# Altium PCB Brduino-Nano.PcbDoc
Units mm, origin at the board's own origin, x right, y up, seen from the top; angles counter-clockwise.
Board outline 43.69 x 19.3 mm, 4 copper layers (Top Layer, InternalPlane1, InternalPlane2, Bottom Layer), stack 1.385 mm thick; 48 components, 77 nets, 233 pads, 118 vias.
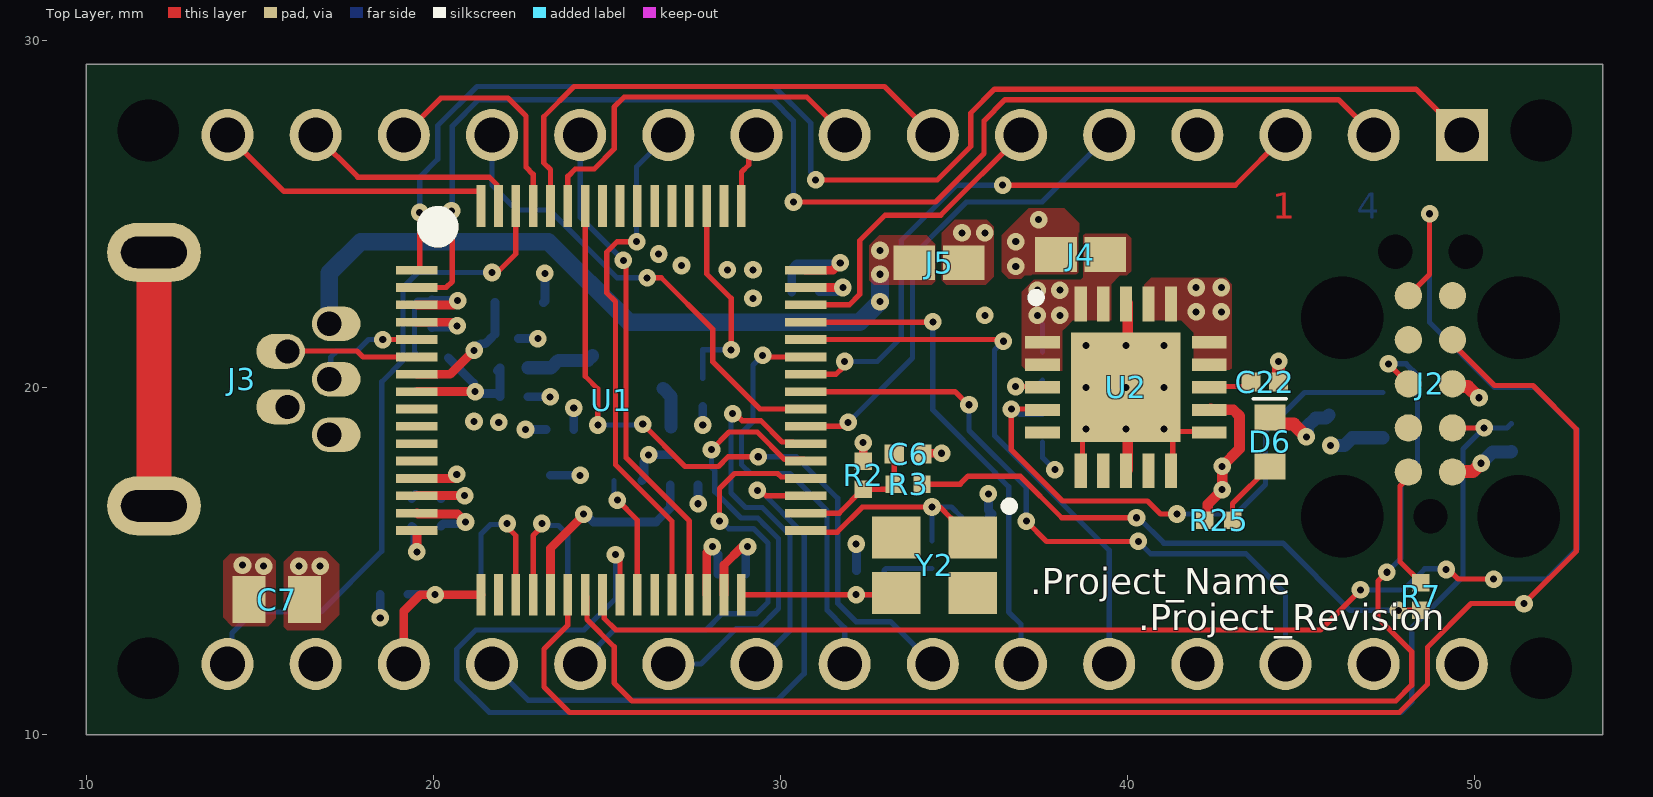
[diagram p0: Top Layer view]
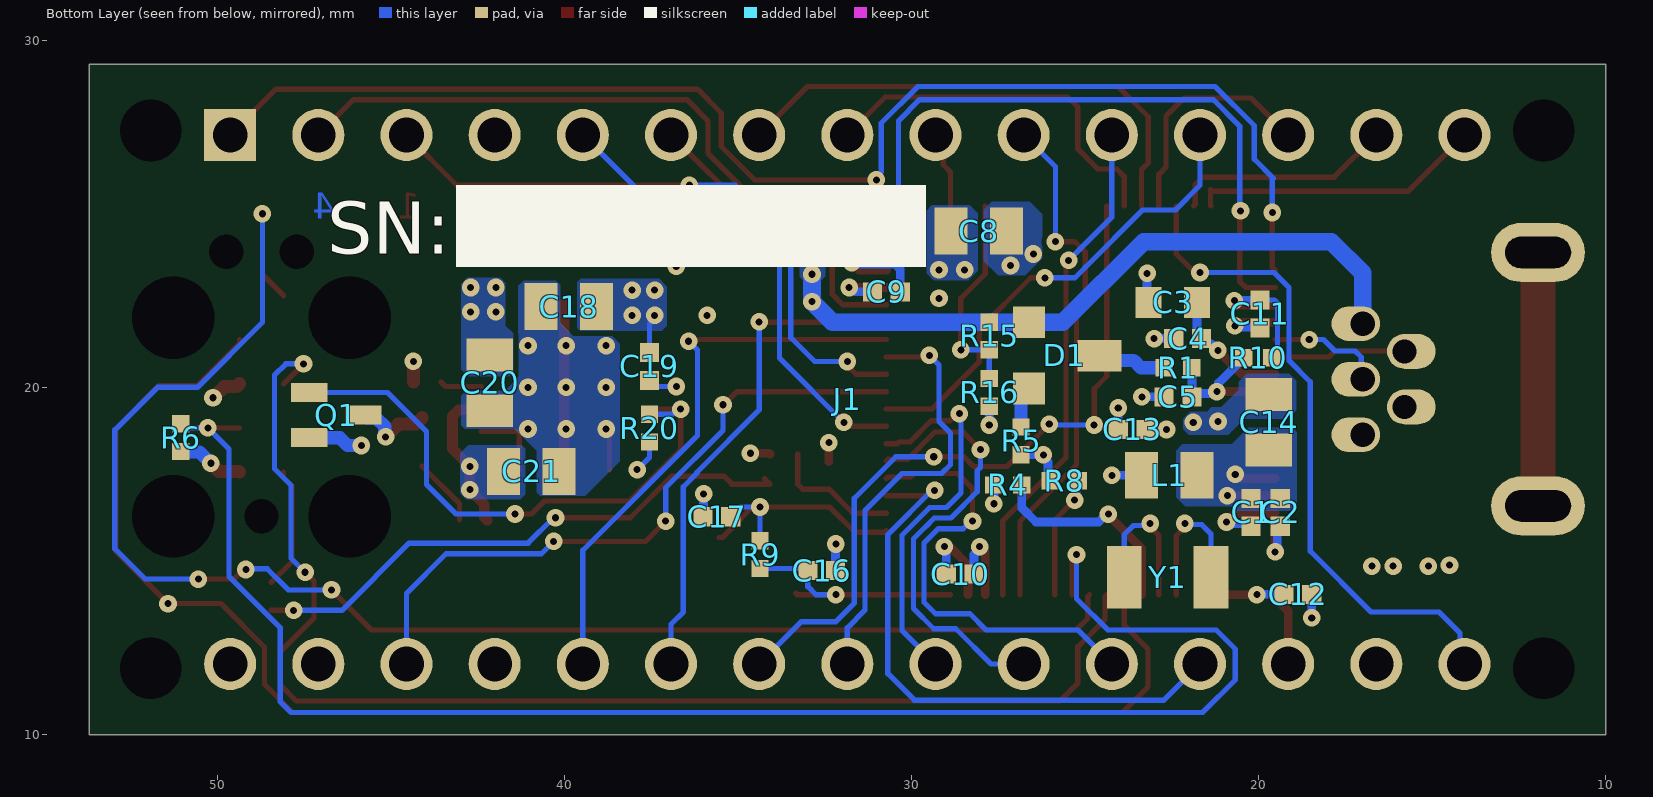
[diagram p1: Bottom Layer view, seen from below]
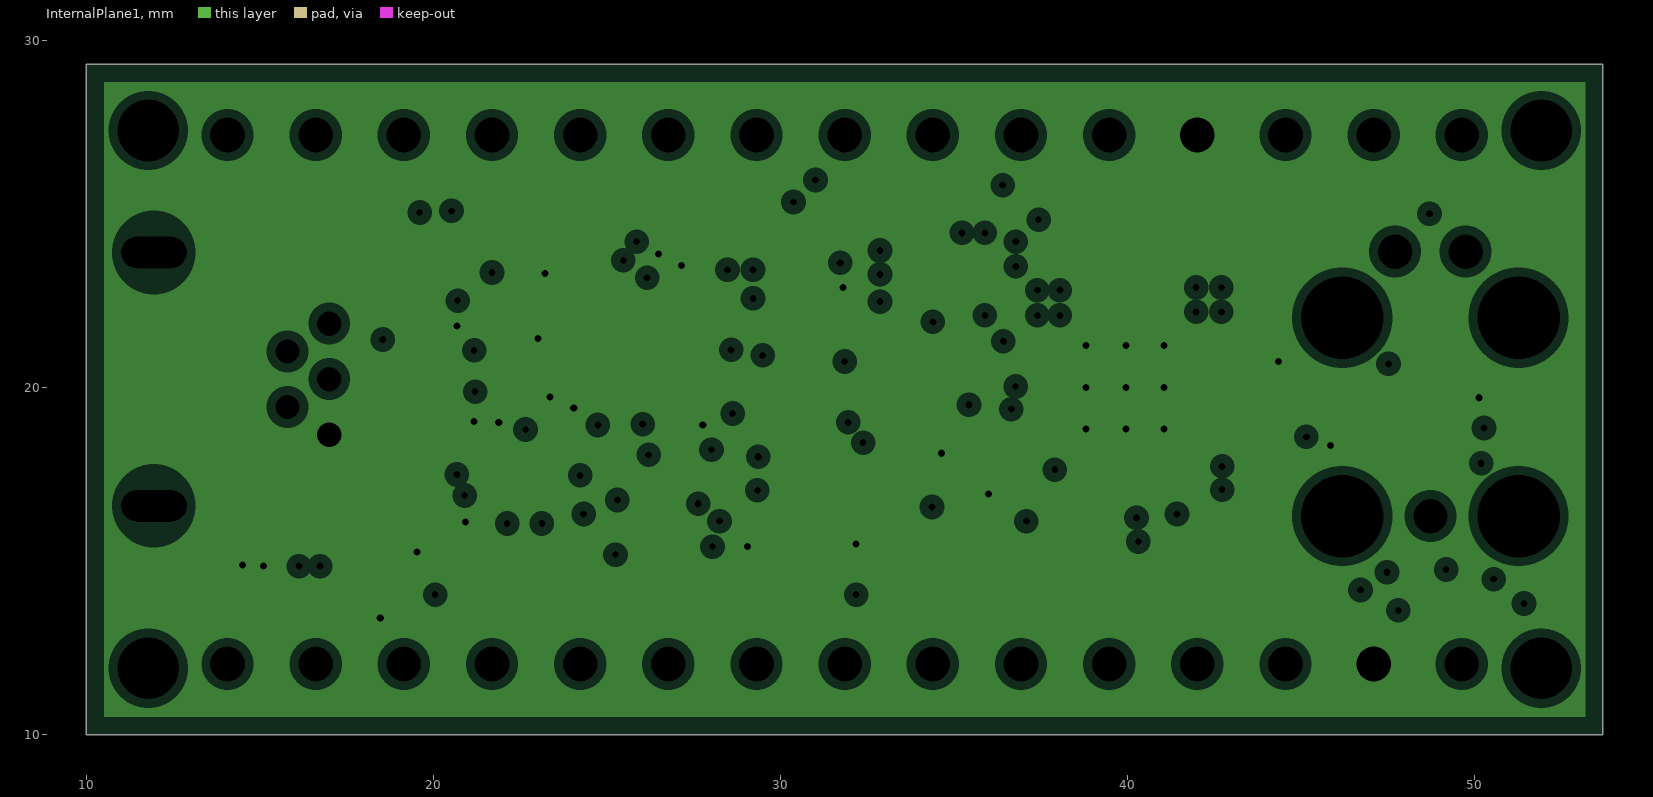
[diagram p2: InternalPlane1, clearances drawn from the general rule]
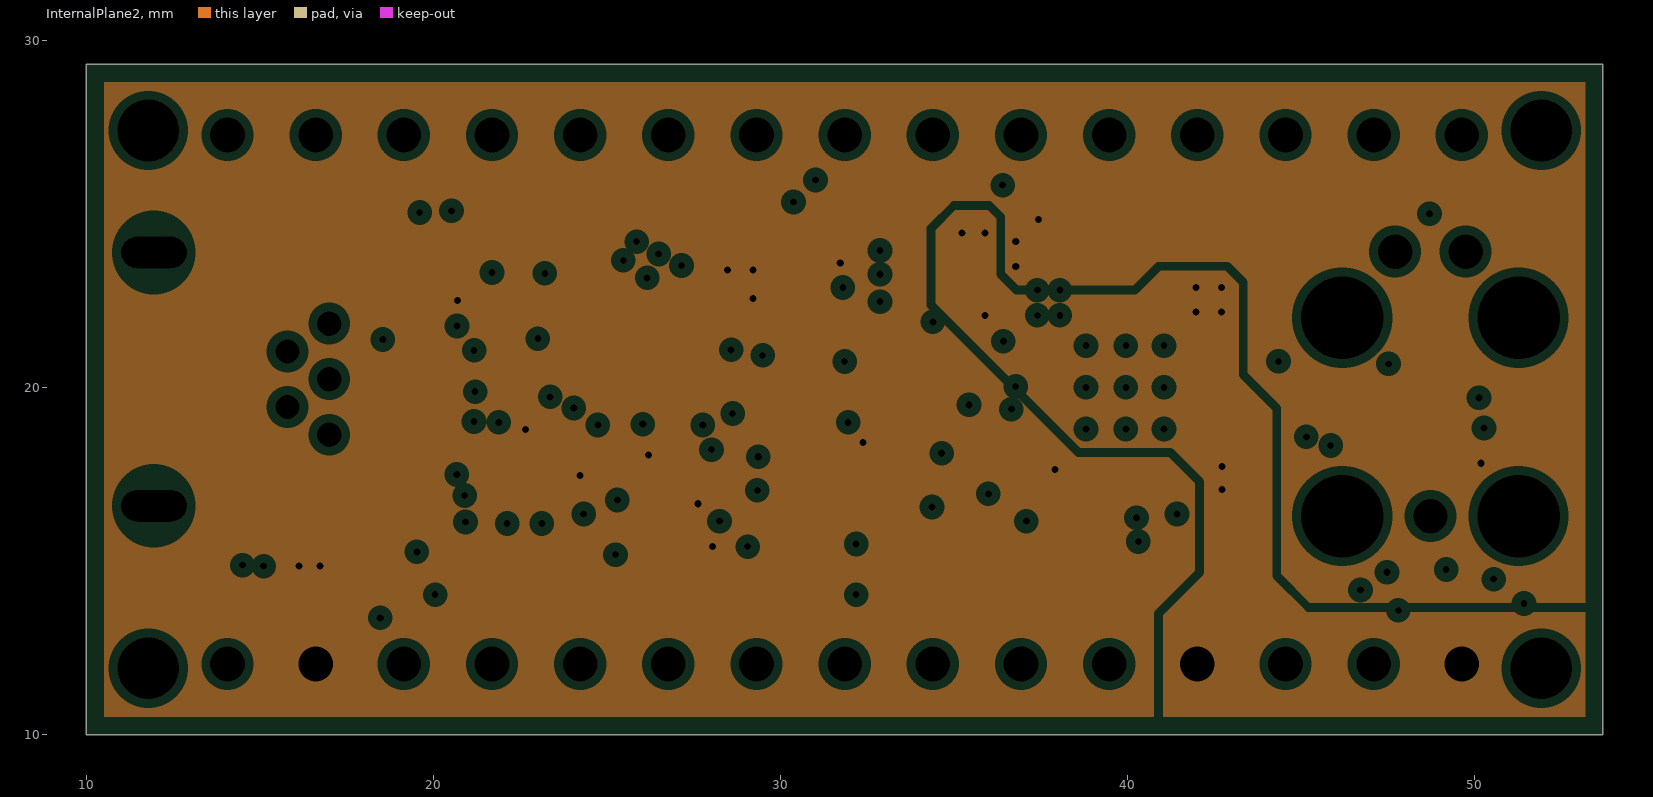
[diagram p3: InternalPlane2, clearances drawn from the general rule]

## Layer stack, top to bottom
Top Solder: solder mask 0.0127, Solder Resist, Dk 3.5
Top Layer: signal copper 0.0175
Dielectric1: prepreg 0.14, FR-4, Dk 4.3
InternalPlane1: plane copper 0.035, net GND
Dielectric2: core 1, FR-4, Dk 4.3
InternalPlane2: plane copper 0.035, net (Multiple Nets)
Dielectric3: prepreg 0.14, FR-4, Dk 4.3
Bottom Layer: signal copper 0.0175
Bottom Solder: solder mask 0.0127, Solder Resist, Dk 3.5

## Board outline
10,10 53.688,10 53.688,29.304 10,29.304

## Design rules (kind name [scope] priority, off if disabled: settings)
AssemblyTestPointUsage [All] p1 off:
AssemblyTestpoint [All] p1 off: testpointundercomponent=TRUE minsize=1.016 maxsize=2.54 preferedsize=1.524 minholesize=0 maxholesize=1.016 preferedholesize=0.813 testpointgrid=0.025 usegrid=FALSE gridtolerance=0 allowsidebottom=TRUE
Clearance Clearance-primary [InNetClass('HV-P')] p1: gap=0.7 ignorepadtopadclearanceinfootprint=FALSE
Clearance [All] p2: gap=0.152 ignorepadtopadclearanceinfootprint=FALSE
ComponentClearance [All] p1 off: gap=0.254 collisioncheckmode=3 verticalgap=0.254 showdistances=FALSE
DiffPairsRouting DiffPairsRouting_USB [InDifferentialPair('CPUSIGA.USB-D_1')] p1: maxlimit=0.254 minlimit=0.152 mostfreqgap=0.152 toplayer_minwidth=0.195 toplayer_maxwidth=0.381 toplayer_prefwidth=0.195 bottomlayer_minwidth=0.195 bottomlayer_maxwidth=0.381 bottomlayer_prefwidth=0.195 maxuncoupledlength=12.7
DiffPairsRouting [InDifferentialPairClass('HighSpeedDiff')] p2: maxlimit=0.256 minlimit=0.156 mostfreqgap=0.156 toplayer_minwidth=0.152 toplayer_maxwidth=0.381 toplayer_prefwidth=0.152 bottomlayer_minwidth=0.152 bottomlayer_maxwidth=0.381 bottomlayer_prefwidth=0.152 maxuncoupledlength=14
FabricationTestPointUsage TestPointUsage [All] p1 off: valid=0 allowmultiple=FALSE
FabricationTestpoint Testpoint [All] p1 off: side=3 testpointundercomponent=TRUE minsize=1.016 maxsize=2.54 preferedsize=1.524 minholesize=0 maxholesize=1.016 preferedholesize=0.813 testpointgrid=0.025 allowsidetop=TRUE allowsidebottom=TRUE usegrid=TRUE gridtolerance=0
Height [All] p1 off: minheight=0 maxheight=25.4 prefheight=12.7
HoleSize [All] p1: absolutevalues=TRUE maxlimit=5.08 minlimit=0.2 maxpercent=80.000 minpercent=20.000
MatchedLengths MatchedLengthsDiff [InDifferentialPair('ETH-TX_8') or InDifferentialPair('ETH-RX_8') or InDifferentialPair('CPUSIGA.USB-D_1')] p1: tolerance=1 checknetsindiffpair=TRUE checkdiffpairvsdiffpair=FALSE checkxsignals=FALSE checkothers=FALSE
MatchedLengths [InxSignalClass('RMII-IF')] p2: tolerance=0.254 checknetsindiffpair=FALSE checkdiffpairvsdiffpair=TRUE checkxsignals=TRUE checkothers=TRUE
MinimumSolderMaskSliver [All] p1 off: minsoldermaskwidth=0.08
NetAntennae [All] p1 off: netantennaetolerance=0
PlaneClearance [All] p1: clearance=0.254
PlaneConnect [All] p1: planeconnectstyle=Direct reliefexpansion=0.508 reliefentries=4 reliefconductorwidth=0.254 reliefairgap=0.254
PolygonConnect [All] p1: connectstyle=Direct reliefconductorwidth=0.254 reliefentries=4 polygonreliefangle="90 Angle" airgapwidth=0.254
RoomDefinition U_Brduino-MCU1 [InComponentClass('U_Brduino-MCU1')] p1: confinementstyle=ConfineIn formatcopy=TRUE lockcomponents=FALSE outline 13.769,12.759 54.256,12.759 54.256,26.424 13.769,26.424
RoomDefinition Brduino-Main [InComponentClass('Brduino-Main')] p2: confinementstyle=ConfineIn formatcopy=TRUE lockcomponents=FALSE outline 9.721,9.721 9.721,29.583 53.967,29.583 53.967,9.721
RoomDefinition U_Brduino-MCU-Main [InComponentClass('U_Brduino-MCU-Main')] p3 off: confinementstyle=ConfineIn formatcopy=TRUE lockcomponents=FALSE outline 7.749,12.81 37.34,12.81 37.34,25.383 7.749,25.383
RoomDefinition U_Brduino-PwrLin [InComponentClass('U_Brduino-PwrLin')] p4 off: confinementstyle=ConfineIn formatcopy=TRUE lockcomponents=FALSE outline 36.095,15.451 48.287,15.451 48.287,24.748 36.095,24.748
RoutingVias [All] p1: holewidth=0.203 width=0.508 viastyle="Through Hole" minholewidth=0.203 minwidth=0.508 maxholewidth=0.508 maxwidth=1.016
SilkToSilkClearance [All] p1 off: silktosilkclearance=0.254
SilkToSolderMaskClearance SilkscreenOverComponentPads [IsPad] p1 off: minsilkscreentomaskgap=0.254 clearancetoexposedcopper=TRUE
SolderMaskExpansion [All] p1: expansion=0.051 istentingtop=FALSE
Width Width_HighSpeedDiff [InDifferentialPairClass('HighSpeedDiff')] p1: maxlimit=0.152 minlimit=0.152 preferedwidth=0.152 minimp=50.000000 maximp=50.000000 favimp=50.000000
Width Width_Fiducial [IsArc and InComponent('FID*')] p2: maxlimit=0.254 minlimit=0.089 preferedwidth=0.254
Width [All] p3: maxlimit=5.08 minlimit=0.152 preferedwidth=0.152
16 further rules are at their usual default settings.

## Classes and differential pairs
component class U_Brduino-PwrLin: C18 C19 C20 C21 C22 D6 J4 Q1 R20 R25 U2
component class U_Brduino-MCU-Main: C16 C17 J3 R9 R15 R16 Y2
component class U_Brduino-MCU1: C1 C2 C3 C4 C5 C6 C7 C8 C9 C10 C11 C12 C13 C14 D1 J2 L1 R1 R2 R3 R4 R5 R6 R7 R8 R10 U1 Y1
component class Brduino-Main: J1 J5
differential pair USB-D_2: +USB-D_2_P -USB-D_2_N

## Components (designator, comment, footprint, x,y, rotation, side; value= is the part's Value field where it differs from the comment)
C1 "C" C0402 20.211,16.401 r270 bottom value=100nF
C2 "C" C0402 19.373,16.401 r270 bottom value=100nF
C3 "C" C0603 22.471,22.446 r0 bottom value=2u2F
C4 "C" C0402 22.04,21.405 r0 bottom value=100nF
C5 "C" C0402 22.319,19.728 r0 bottom value=100nF
C6 "C" C0402 33.673,18.077 r0 top value=100nF
C7 "C" C0805 15.486,13.886 r180 top value=10uF
C8 "C" C0805 28.059,24.503 r180 bottom value=10uF
C9 "C" C0402 30.719,22.752 r0 bottom value=100nF
C10 "C" C0402 28.593,14.623 r0 bottom value=100nF
C11 "C" C0402 19.957,22.116 r270 bottom value=100nF
C12 "C" C0402 18.865,14.039 r180 bottom value=100nF
C13 "C" C0402 23.64,18.788 r180 bottom value=100nF
C14 "C" C0805 19.703,18.992 r270 bottom value=4u7F
C16 "C" C0402 32.581,14.724 r180 bottom value=22pF
C17 "C" C0402 35.603,16.274 r0 bottom value=22pF
C18 "C" C0805 39.869,22.327 r180 bottom value=22uF
C19 "C" C0402 37.544,20.602 r270 bottom value=10nF
C20 "C" C0805 42.144,20.127 r90 bottom value=10uF
C21 "C" C0805 40.944,17.577 r0 bottom value=10uF
C22 "C" C0402 43.944,20.152 r0 top value=10nF
D1 "D" SOT23 25.596,20.922 r270 bottom
D6 "D" LED0603 44.094,18.427 r90 top value=Green
J1 "X" ARDUINO-NANO 31.844,19.652 r180 bottom locked
J2 "X" JLINK-NEEDLE 48.719,20.102 r90 top locked
J3 "X" Molex-0565790519 14.47,20.236 r0 top locked
J4 "R" JumperSMD 38.644,23.827 r180 top value=0R
J5 "R" JumperSMD 34.562,23.589 r180 top value=0R
L1 "L" L0805 22.573,17.468 r180 bottom value=600R@100MHz
Q1 "Q" SOT323 46.569,19.202 r180 bottom
R1 "R" R0402 22.319,20.566 r180 bottom value=0R
R2 "R" R0402 32.377,17.468 r90 top value=4K7
R3 "R" R0402 33.673,17.214 r0 top value=22R
R4 "R" R0402 27.221,17.188 r0 bottom value=100R
R5 "R" R0402 26.84,18.458 r90 bottom value=0R
R6 "R" R0402 51.044,18.552 r270 bottom value=10K
R7 "R" R0402 48.444,13.977 r270 top value=33R
R8 "R" R0402 25.596,17.315 r0 bottom value=10K
R9 "R" R0402 34.359,15.182 r270 bottom value=1M
R10 "R" R0402 20.022,20.853 r0 bottom value=0R
R15 "R" R0402 27.755,21.481 r90 bottom value=4K7
R16 "R" R0402 27.755,19.855 r90 bottom value=10K
R20 "R" R0402 37.544,18.827 r270 bottom value=4K7
R25 "R" R0402 42.619,16.177 r0 top value=3K9
U1 "U" NXP-SOT1699-1 25.119,19.627 r0 top locked
U2 "U" S-PVQFN-N20 39.944,20.002 r0 top
Y1 "Y" CM7V-T1A 22.619,14.524 r180 bottom value=32.768KHz
Y2 "Y" FA-238 34.435,14.877 r180 top locked value=24.0000MHz

## Footprints (in the part's own frame and the unit in brackets; to place one, negate y for a bottom-side part, rotate by r counter-clockwise, add the part's x,y. Pads: shape width x height; smd on the part's side, far side on the other; paste and mask are expansions set on the pad)
ARDUINO-NANO [mm]
  rect 1.5x1.5 hole 1: 1(-17.78,7.62)
  round 1.5 hole 1: 2(-15.24,7.62) 3(-12.7,7.62) 4(-10.16,7.62) 5(-7.62,7.62) 6(-5.08,7.62) 7(-2.54,7.62) 8(0,7.62) 9(2.54,7.62) 10(5.08,7.62) 11(7.62,7.62) 12(10.16,7.62) 13(12.7,7.62) 14(15.24,7.62) 15(17.78,7.62) 16(17.78,-7.62) 17(15.24,-7.62) 18(12.7,-7.62) 19(10.16,-7.62) 20(7.62,-7.62) 21(5.08,-7.62) 22(2.54,-7.62) 23(0,-7.62) 24(-2.54,-7.62) 25(-5.08,-7.62) 26(-7.62,-7.62) 27(-10.16,-7.62) 28(-12.7,-7.62) 29(-15.24,-7.62) 30(-17.78,-7.62)
  round 0 hole 1.778 unplated: M1(-20.066,-7.747) M2(-20.066,7.747) M3(20.066,7.747) M4(20.066,-7.747)
  body extent -19.05,-8.89 19.05,8.89, height 6.35
C0402 [mm] "Chip Capacitor; Body 1.0x0.5mm (LxW typ), IPC High Density"
  rect 0.55x0.55 smd: 1(-0.4,0) 2(0.4,0)
  body extent -0.5,-0.25 0.5,0.25, height 0.5
C0603 [mm] "Chip Capacitor; Body 1.6x0.8mm (LxW typ), IPC High Density"
  rect 0.75x0.9 smd: 1(-0.7,0) 2(0.7,0)
  body extent -0.8,-0.4 0.8,0.4, height 0.8
C0805 [mm] "Chip Capacitor; Body 2.0x1.3mm (LxW typ), IPC High Density"
  rect 0.95x1.35 smd: 1(-0.8,0) 2(0.8,0)
  body extent -1,-0.62 1,0.63, height 0.6
CM7V-T1A [mm]
  rect 1x1.8 smd: 1(-1.25,0) 2(1.25,0)
  body extent -1.6,-0.75 1.6,0.75, height 0.75
FA-238 [mm]
  rect 1.4x1.2 smd: 1(-1.1,-0.8) 2(1.1,-0.8) 3(1.1,0.8) 4(-1.1,0.8)
  silkscreen extent -2.28,-1.82 -2.03,-1.58, body extent -1.6,-1.25 1.6,1.25, height 0.8
JLINK-NEEDLE [mil]
  round 31 smd paste-31: 1(-100,-25) 2(-50,-25) 3(0,-25) 4(50,-25) 5(100,-25) 6(100,25) 7(50,25) 8(0,25) 9(-50,25) 10(-100,25)
  round 0 hole 93.5 unplated: M1(-150,100) M2(-150,-100) M3(75,100) M4(75,-100)
  round 0 hole 39 unplated: P1(-150,0) P2(150,40) P3(150,-40)
JumperSMD [mm] "Chip Resistor, Body 1.6x0.8mm (LxW typ), IPC High Density"
  rect 1.2x1 smd: 1(-0.711,0) 2(0.711,0)
  body extent -0.8,-0.4 0.8,0.4, height 0.45
L0805 [mm]
  rect 0.95x1.35 smd: 1(-0.8,0) 2(0.8,0)
  body extent -1,-0.62 1,0.63, height 0.6
LED0603 [mm]
  rect 0.75x0.9 smd: 1(-0.7,0) 2(0.7,0)
  silkscreen extent 1.25,-0.47 1.25,0.48, body extent -0.8,-0.4 0.8,0.4, height 0.63
Molex-0565790519 [mm]
  oval 1.4x1 hole 0.7 copper offset 0.2,0: 1(2.525,1.6) 3(2.525,0) 5(2.525,-1.6)
  oval 1.4x1 hole 0.7 copper offset -0.2,0: 2(1.325,0.8) 4(1.325,-0.8)
  oval 2.7x1.7 hole 0.9 slot 1.9 at 0 deg: M1(-2.525,-3.65) M2(-2.525,3.65)
  body extent -6.27,-3.85 2.73,3.85, height 3.95
NXP-SOT1699-1 [mm] "TSQFP, 64-Leads, Body 10.00x10.00mm, Pitch 0.50mm, IPC High Density"
  rect 1.2x0.25 smd: 1(-5.6,3.75) 2(-5.6,3.25) 3(-5.6,2.75) 4(-5.6,2.25) 5(-5.6,1.75) 6(-5.6,1.25) 7(-5.6,0.75) 8(-5.6,0.25) 9(-5.6,-0.25) 10(-5.6,-0.75) 11(-5.6,-1.25) 12(-5.6,-1.75) 13(-5.6,-2.25) 14(-5.6,-2.75) 15(-5.6,-3.25) 16(-5.6,-3.75) 33(5.6,-3.75) 34(5.6,-3.25) 35(5.6,-2.75) 36(5.6,-2.25) 37(5.6,-1.75) 38(5.6,-1.25) 39(5.6,-0.75) 40(5.6,-0.25) 41(5.6,0.25) 42(5.6,0.75) 43(5.6,1.25) 44(5.6,1.75) 45(5.6,2.25) 46(5.6,2.75) 47(5.6,3.25) 48(5.6,3.75)
  rect 0.25x1.2 smd: 17(-3.75,-5.6) 18(-3.25,-5.6) 19(-2.75,-5.6) 20(-2.25,-5.6) 21(-1.75,-5.6) 22(-1.25,-5.6) 23(-0.75,-5.6) 24(-0.25,-5.6) 25(0.25,-5.6) 26(0.75,-5.6) 27(1.25,-5.6) 28(1.75,-5.6) 29(2.25,-5.6) 30(2.75,-5.6) 31(3.25,-5.6) 32(3.75,-5.6) 49(3.75,5.6) 50(3.25,5.6) 51(2.75,5.6) 52(2.25,5.6) 53(1.75,5.6) 54(1.25,5.6) 55(0.75,5.6) 56(0.25,5.6) 57(-0.25,5.6) 58(-0.75,5.6) 59(-1.25,5.6) 60(-1.75,5.6) 61(-2.25,5.6) 62(-2.75,5.6) 63(-3.25,5.6) 64(-3.75,5.6)
  silkscreen extent -5.3,4.7 -4.7,5.3, body extent -6,-6 6,6, height 1.35
R0402 [mm] "Chip Resistor, Body 1.1x0.5mm (LxW typ), IPC High Density"
  rect 0.5x0.5 smd: 1(-0.4,0) 2(0.4,0)
  body extent -0.5,-0.25 0.5,0.25, height 0.35
S-PVQFN-N20 [mm] "(RGW) QFN 5mmx5mm, RM 0.65mm"
  rect 1x0.35 smd: 1(-2.4,1.3) 2(-2.4,0.65) 3(-2.4,0) 4(-2.4,-0.65) 5(-2.4,-1.3) 11(2.4,-1.3) 12(2.4,-0.65) 13(2.4,0) 14(2.4,0.65) 15(2.4,1.3)
  rect 0.35x1 smd: 6(-1.3,-2.4) 7(-0.65,-2.4) 8(0,-2.4) 9(0.65,-2.4) 10(1.3,-2.4) 16(1.3,2.4) 17(0.65,2.4) 18(0,2.4) 19(-0.65,2.4) 20(-1.3,2.4)
  rect 3.15x3.15 smd: 21(0,0)
  silkscreen extent -2.71,2.46 -2.46,2.71, body extent -2.58,-2.58 2.59,2.59, height 1
SOT23 [mil]
  rect 36x36 smd: 1(-37.5,-40) 2(37.5,-40)
  rect 36x50 smd: 3(0.5,40)
  body extent -59,-49 59,49, height 43
SOT323 [mm]
  rect 1.05x0.55 smd: 1(-0.775,0.65) 2(-0.775,-0.65) 3(0.775,0)
  body extent -1.15,-1.05 1.15,1.05, height 1

## Part data
C1 C2 C4 C5 C6 C9 C10 C11 C12 C13: library part CAP, "CAP CER 0.1UF 25V X7R 0402", 04. Manufacturer=Yageo, 05. Manufacturer PN=CC0402KRX7R8BB104, 01. Distributor=DigiKey, 02. Distributor PN=311-2077-6-ND, 03. Unit Price=0.08, Parameters="X7R, 25V, 10%", POPULATED=yes
C3: library part CAP, "CAP CER 2.2UF 10V X5R 0603", 04. Manufacturer="Samsung Electro-Mechanics", 05. Manufacturer PN=CL10A225KP8NNNC, 01. Distributor=DigiKey, 02. Distributor PN=1276-1085-6-ND, 03. Unit Price=0.08, Parameters="X7R, 25V, 10%", POPULATED=yes
C7 C8: library part CAP, "CAP CER 10UF 10V X7R 0805", 04. Manufacturer="Murata Electronics", 05. Manufacturer PN=GRM21BR71A106KA73L, 01. Distributor=DigiKey, 02. Distributor PN=490-10516-6-ND, 03. Unit Price=0.21, Parameters="X7R, 25V, 10%", POPULATED=yes
C14: library part CAP, "CAP CER 4.7UF 10V X7R 0805", 04. Manufacturer="Samsung Electro-Mechanics", 05. Manufacturer PN=CL21B475KPFNNNE, 01. Distributor=DigiKey, 02. Distributor PN=1276-2972-6-ND, 03. Unit Price=0.21, Parameters="X7R, 25V, 10%", POPULATED=yes
C16 C17: library part CAP, "CAP CER 22PF 16V C0G/NP0 0402", 04. Manufacturer=KEMET, 05. Manufacturer PN=C0402C220J4GACTU, 01. Distributor=DigiKey, 02. Distributor PN=399-8954-6-ND, 03. Unit Price=0.08, Parameters="X7R, 25V, 10%", POPULATED=yes
C18: library part CAP, "CAP CER 22UF 10V X5R 0805", 04. Manufacturer="Murata Electronics", 05. Manufacturer PN=GRM21BR61A226ME44#, 01. Distributor=DigiKey, 02. Distributor PN=490-10746-6-ND, 03. Unit Price=0.49, Parameters="X7R, 25V, 10%", POPULATED=yes
C19 C22: library part CAP, "CAP CER 10000PF 50V X7R 0402", 04. Manufacturer="Murata Electronics", 05. Manufacturer PN=GRM155R71H103KA88D, 01. Distributor=DigiKey, 02. Distributor PN=490-4516-6-ND, 03. Unit Price=0.08, Parameters="X7R, 25V, 10%", POPULATED=yes
C20 C21: library part CAP, "CAP CER 10UF 25V X5R 0805", 04. Manufacturer="Murata Electronics", 05. Manufacturer PN=GRM21BR61E106KA73L, 01. Distributor=DigiKey, 02. Distributor PN=490-5523-6-ND, 03. Unit Price=0.37, Parameters="X7R, 25V, 10%", POPULATED=yes
D1: library part DUALSDIODE-CC, "DIODE ARRAY SCHOTTKY 30V SOT23-3", 04. Manufacturer=ONSEMI, 05. Manufacturer PN=BAT54C, 01. Distributor=DigiKey, 02. Distributor PN=BAT54CFSCT-ND, 03. Unit Price=0.18, POPULATED=yes
D6: library part LED, "LED GREEN CLEAR 1608 SMD", 04. Manufacturer=KINGBRIGHT, 05. Manufacturer PN=APHD1608LCGCK, 01. Distributor=DigiKey, 02. Distributor PN=754-2031-6-ND, 03. Unit Price=0.34, Parameters="If >= 2mA", POPULATED=yes
J1: library part ARDUINO-NANO-CON, 01. Distributor=DigiKey
J2: library part JLINK-NEEDLE, 01. Distributor=DigiKey
J3: library part MICRO-USB, "CONN RCPT USB2.0 MINI AB 5P R/A", 04. Manufacturer=Molex, 05. Manufacturer PN=0565790519, 01. Distributor=DigiKey, 02. Distributor PN=WM17121-ND, 03. Unit Price=2.04, POPULATED=yes
J4 J5: library part Jumper, "RES SMD 0 OHM JUMPER 1/10W 0603", 04. Manufacturer=Yageo, 05. Manufacturer PN=RC0603JR-070RL, 01. Distributor=DigiKey, 02. Distributor PN=311-0.0GRDKR-ND, 03. Unit Price=0.08, POPULATED=yes
L1: library part FERRITE, "FERRITE BEAD 600 OHM 0805 1LN", 04. Manufacturer=WUERTH, 05. Manufacturer PN=742792040, 01. Distributor=DigiKey, 02. Distributor PN=732-1620-6-ND, 03. Unit Price=0.18, Parameters="Idc=2A, Rdc=0.15R", POPULATED=yes
Q1: library part MOSFET-N-D, "MOSFET N-CHANNEL 30V 1A SC70", 04. Manufacturer=NEXPERIA, 05. Manufacturer PN=PMF250XNEX, 01. Distributor=DigiKey, 02. Distributor PN=1727-2693-6-ND, 03. Unit Price=0.31, POPULATED=yes
R1 R5 R10: library part RES1A, "RES SMD 0 OHM JUMPER 1/16W 0402", 04. Manufacturer=Yageo, 05. Manufacturer PN=RC0402JR-070RL, 01. Distributor=DigiKey, 02. Distributor PN=311-0.0JRDKR-ND, 03. Unit Price=0.08, Parameters="1/16W, 50V, 1%", POPULATED=yes
R2 R15 R20: library part RES1A, "RES SMD 4.7K OHM 1% 1/16W 0402", 04. Manufacturer=Yageo, 05. Manufacturer PN=RC0402FR-074K7L, 01. Distributor=DigiKey, 02. Distributor PN=311-4.7KLRDKR-ND, 03. Unit Price=0.08, Parameters="1/16W, 50V, 1%", POPULATED=yes
R3: library part RES1A, "RES SMD 22 OHM 1% 1/16W 0402", 04. Manufacturer=Yageo, 05. Manufacturer PN=RC0402FR-0722RL, 01. Distributor=DigiKey, 02. Distributor PN=311-22.0LRDKR-ND, 03. Unit Price=0.08, Parameters="1/16W, 50V, 1%", POPULATED=yes
R4: library part RES1A, "RES SMD 100 OHM 1% 1/16W 0402", 04. Manufacturer=Yageo, 05. Manufacturer PN=RC0402FR-07100RL, 01. Distributor=DigiKey, 02. Distributor PN=311-100LRDKR-ND, 03. Unit Price=0.08, Parameters="1/16W, 50V, 1%", POPULATED=yes
R6 R8 R16: library part RES1A, "RES SMD 10K OHM 1% 1/16W 0402", 04. Manufacturer=Yageo, 05. Manufacturer PN=RC0402FR-0710KL, 01. Distributor=DigiKey, 02. Distributor PN=311-10.0KLRDKR-ND, 03. Unit Price=0.08, Parameters="1/16W, 50V, 1%", POPULATED=yes
R7: library part RES1A, "RES SMD 33 OHM 1% 1/16W 0402", 04. Manufacturer=Yageo, 05. Manufacturer PN=RC0402FR-0733RL, 01. Distributor=DigiKey, 02. Distributor PN=311-33.0LRDKR-ND, 03. Unit Price=0.08, Parameters="1/16W, 50V, 1%", POPULATED=yes
R9: library part RES1A, "RES SMD 1M OHM 1% 1/16W 0402", 04. Manufacturer=Yageo, 05. Manufacturer PN=RC0402FR-071ML, 01. Distributor=DigiKey, 02. Distributor PN=311-1.00MLRDKR-ND, 03. Unit Price=0.08, Parameters="1/16W, 50V, 1%", POPULATED=yes
R25: library part RES1A, "RES SMD 3.9K OHM 1% 1/16W 0402", 04. Manufacturer=Yageo, 05. Manufacturer PN=RC0402FR-073K9L, 01. Distributor=DigiKey, 02. Distributor PN=311-3.90KLRDKR-ND, 03. Unit Price=0.08, Parameters="1/16W, 50V, 1%", POPULATED=yes
U1: library part MK22FN512VLH12, "IC MCU 32BIT 512KB FLASH 64LQFP", 04. Manufacturer="NXP USA Inc.", 01. Distributor=DigiKey, 02. Distributor PN=MK22FN512VLH12-ND, 03. Unit Price=7.16, 05. Manufacturer PN=MK22FN512VLH12, POPULATED=yes
U2: library part TPS7A8300, "IC REG LINEAR POS ADJ 2A 20VQFN", 04. Manufacturer="Texas Instruments", 05. Manufacturer PN=TPS7A8300RGWT, 01. Distributor=DigiKey, 02. Distributor PN=296-36510-6-ND, 03. Unit Price=4.57, POPULATED=yes
Y1: library part CM7V-T1A, "Crystals 32.768 kHz 9.0 pF +/-20 PPM", 04. Manufacturer="Micro Crystal", 05. Manufacturer PN="CM7V-T1A-32.768k-9pF-20PPM-TA-QA T3", 01. Distributor=Mouser, 02. Distributor PN=428-201568-MG03, 03. Unit Price=0.37, POPULATED=yes
Y2: library part FA-238, "CRYSTAL 24.0000MHZ 18PF SMD", 04. Manufacturer=EPSON, 05. Manufacturer PN="FA-238 24.0000MB-C3", 01. Distributor=DigiKey, 02. Distributor PN=SER3689DKR-ND, 03. Unit Price=0.30, Parameters="-20°C/+70°C, 50ppm, 18pF, 60ohms", POPULATED=yes

## Via types
v1: diameter 0.508, hole 0.203, Top Layer to Bottom Layer, tented both sides, 106 vias
v2: diameter 0.508, hole 0.203, Top Layer to Bottom Layer, tented top, 12 vias

## Nets (pads, with @x,y where several pads share a name; then routed paths per layer and width w, separated by ;. In a path a pad name is that pad's centre, name@x,y a point inside that pad or via, vN(x,y) a via of type N, cw(c..) or ccw(c..) an arc to the next point about the centre after c; other vN are vias at no path point)
3V3: C7.1 C8.1 C9.1 C10.1 C11.1 C13.2 J1.17 J2.1 J4.2 L1.1 R2.2 R4.2 R5.1 R6.2 R8.2 R10.1 R20.2 U1.3 U1.30 U1.48 | length 16.6
  Top Layer w0.152: v1(37.898,17.631) 37.898,17.623 v1@37.919,17.602
  Top Layer w0.254: U1.3 20.574,22.377 v1(20.693,22.497) ; U1.30 27.869,15.245 v1(28.034,15.41) ; U1.48 31.505,23.377 v1(31.717,23.589) ; R2.2 v1(32.377,18.407)
  Top Layer w0.381: J2.1 49.368,17.576 49.943,17.576 v2(50.181,17.814)
  Bottom Layer w0.152: R10.1 19.453,21.022 19.453,22.427 19.542,22.516 C11.1 ; R20.2 37.544,17.977 37.89,17.631 v1(37.898,17.631)
  Bottom Layer w0.254: C11.1 19.966,22.506 20.684,22.506 v1(20.693,22.497) ; v1(22.649,18.788) C13.2 ; L1.1 v1(24.224,17.468) ; R8.2 26.059,17.379 26.059,17.85 26.199,17.989 v1(26.199,18.058) R5.1 ; v1(27.621,16.648) R4.2 ; v1(28.034,15.41) 28.034,15.341 28.193,15.183 C10.1 ; C9.1 30.319,23.408 30.468,23.557 31.685,23.557 v1(31.717,23.589)
  Bottom Layer w0.381: v2(50.181,17.814) 50.508,18.141 51.033,18.141 R6.2
  other v1: 16.121,14.851 16.731,14.851 28.466,23.386 29.202,23.386 36.772,23.487 36.772,24.199 37.432,24.834
  other v2: 29.202,22.567
5V: C20.2 C21.2 J1.27 J1.30 J5.1 R25.1 U2.12 U2.14 U2.15 U2.16 U2.17 | length 4.3
  Top Layer w0.305: R25.1 42.3,16.258 42.3,16.633 v1(42.719,17.052) v1(42.719,17.727) 43.219,18.227 43.219,19.176 43.04,19.354 42.417,19.354 U2.12@42.394,19.377
  other v1: 41.969,22.177 42.694,22.177 41.969,22.877 35.222,24.453 35.883,24.453
  other v2: 35.883,22.077 42.694,22.877
ADC0_DM0: U1.10
ADC0_DP0: U1.9
ADC1_DM0: U1.12
ADC1_DP0: U1.11
CHASSIS: J3.M1 J3.M2 | length 7.3
  Top Layer w1.016: J3.M1 J3.M2
DAC0: U1.18
EXTAL0_2: C16.1 R9.2 U1.32 Y2.3 | length 7.3
  Top Layer w0.152: U1.32 v1(32.174,14.027) 33.285,14.027 Y2.3
  Bottom Layer w0.152: v1(32.174,14.027) 32.747,14.027 32.981,14.261 C16.1 33.038,14.782 R9.2
GND: C1.2 C2.2 C3.2 C4.2 C5.2 C6.2 C7.2 C8.2 C9.2 C10.2 C11.2 C12.2 C13.1 C14.1 C16.2 C17.2 C18.1 C20.1 C21.1 C22.2 J1.4 J1.29 J2.3 J3.5 Q1.2 R16.1 U1.4 U1.15 U1.16 U1.31 U1.47 U2.6 U2.8 U2.10 U2.11 U2.18 U2.21 | length 27.2
  Top Layer w0.152: U2.6@38.694,17.627 U2.21@38.694,18.727 ; U2.10@41.294,17.627 41.294,18.727 U2.11@42.394,18.727
  Top Layer w0.254: v1(19.519,15.264) U1.16 ; U1.15 19.546,16.35 20.693,16.35 v1(20.922,16.121) ; U1.4 20.572,21.877 v1(20.678,21.77) ; U1.31 28.369,14.882 28.898,15.41 v1(29.05,15.41) ; U1.47 v1(31.792,22.877) ; C6.2 34.098,18.103 v1(34.638,18.103)
  Top Layer w0.305: U2.8@39.994,17.627 39.994,20.027 U2.18@39.994,22.427
  Top Layer w0.381: C22.2 v1(44.344,20.752) ; J2.3 49.432,20.024 49.797,20.024 v2(50.119,19.702)
  Bottom Layer w0.254: v1(18.465,13.359) C12.2 ; C2.2 19.458,15.916 19.458,15.394 19.519,15.333 v1(19.519,15.264) ; C11.2 19.977,21.736 20.644,21.736 v1(20.678,21.77) ; C1.2 20.283,16.073 20.873,16.073 v1(20.922,16.121) ; C4.2 v1(23.005,21.405) ; C5.2 v1(23.36,19.728) ; C3.2 23.208,22.483 v1(23.208,23.284) ; C13.1 v1(24.04,19.404) ; v1(27.755,18.915) R16.1 ; C10.2 28.993,15.284 29.05,15.341 v1(29.05,15.41) ; C9.2@31.119,22.757 31.604,22.757 31.724,22.877 v1(31.792,22.877) ; v1(32.174,15.486) 32.174,15.385 32.181,15.378 C16.2 ; v1(35.984,16.934) 35.984,16.458 36.086,16.356 C17.2
  Bottom Layer w0.381: v1(45.844,18.327) 46.244,18.327 46.469,18.552 Q1.2
  other v1: 15.105,14.851 14.496,14.877 38.794,18.802 39.944,18.802 41.044,18.802 21.878,18.992 21.167,19.017 38.794,20.002 39.944,20.002 41.044,20.002 38.794,21.202 39.944,21.202 41.044,21.202 27.145,23.513 26.485,23.843
NetC3_1: C3.1 C4.1 U1.7 | length 3.6
  Top Layer w0.254: U1.7 20.479,20.377 v1(21.168,21.067)
  Bottom Layer w0.254: v1(21.168,21.067) 21.358,21.257 21.492,21.257 C4.1 21.771,21.536 C3.1
NetC6_1: C6.1 R2.1 R3.1 U1.34 | length 3.8
  Top Layer w0.152: U1.34 31.687,16.377 R2.1 33.127,17.068 R3.1 C6.1
NetC19_2: C19.2 U2.3 | length 1.7
  Top Layer w0.152: v1(36.769,20.027) U2.3@37.594,20.027
  Bottom Layer w0.152: v1(36.769,20.027) 37.369,20.027 C19.2
NetC22_1: C22.1 U2.13 | length 1.2
  Top Layer w0.152: U2.13@42.394,20.027 43.419,20.027 C22.1
NetD1_2: D1.2 R5.2 | length 1.2
  Bottom Layer w0.381: D1.2 26.84,19.741 R5.2
NetD1_3: D1.3 R1.1 | length 2
  Bottom Layer w0.381: R1.1 23.386,20.566 23.596,20.777 24.447,20.777 D1.3
NetD6_1: D6.1 R25.2 | length 2
  Top Layer w0.152: R25.2 43.019,16.652 D6.1
NetD6_2: D6.2 Q1.3 | length 2.3
  Top Layer w0.381: D6.2 44.278,18.943 44.778,18.943 v1(45.144,18.577)
  Bottom Layer w0.381: v1(45.144,18.577) 45.168,18.601 45.168,18.876 45.409,19.118 45.709,19.118 Q1.3
NetJ2_5: J2.5
NetJ2_7: J2.7
NetJ2_9: J2.9
NetJ2_10: J2.10 R7.1 | length 3.5
  Top Layer w0.152: J2.10 48.084,17.395 47.844,17.155 47.844,14.977 R7.1
NetJ3_4: J3.4
NetU1_19: U1.19 Y1.2 | length 4.3
  Top Layer w0.152: v1(22.119,16.078) 22.119,15.982 22.369,15.732 U1.19
  Bottom Layer w0.152: Y1.2 21.369,15.781 21.636,16.048 22.089,16.048 v1(22.119,16.078)
NetU1_20: U1.20 Y1.1 | length 4.3
  Top Layer w0.152: U1.20 22.869,15.732 23.119,15.982 v1(23.119,16.078)
  Bottom Layer w0.152: v1(23.119,16.078) 23.175,16.022 23.602,16.022 23.869,15.755 Y1.1
NetU2_5: U2.5
NetU2_7: U2.7
NetU2_9: U2.9
nRESET_1: R3.2 R7.2 | length 16.3
  Top Layer w0.152: R3.2@34.225,17.366 R3.2 35.171,17.214 35.4,17.442 36.899,17.442 38.096,16.244 v2(40.251,16.244) ; v1(47.794,13.577) R7.2
  Bottom Layer w0.152: v2(40.251,16.244) 40.306,16.244 41.039,15.512 44.468,15.512 46.403,13.577 v1(47.794,13.577)
PGOOD1_1: Q1.1 R20.1 U2.4 | length 16.6
  Top Layer w0.152: U2.4@37.594,19.377 36.649,19.377 v1(36.645,19.373) 36.645,18.201 38.119,16.727 40.569,16.727 40.944,16.352 v1(41.419,16.352)
  Bottom Layer w0.152: 36.886,19.227 R20.1 ; v1(41.419,16.352) 43.119,16.352 43.969,17.202 43.969,18.727 45.094,19.852 Q1.1
PTA0_3: J2.4 U1.22 | length 43.7
  Top Layer w0.152: U1.22 23.869,13.15 23.183,12.464 23.183,11.372 23.919,10.635 47.821,10.635 48.633,11.448 48.633,12.515 49.891,13.772 v2(51.414,13.772) 52.919,15.277 52.919,18.802 51.669,20.052 50.569,20.052 49.354,21.267 J2.4
PTA1_3: J2.8 U1.23 | length 37.8
  Top Layer w0.152: U1.23 24.418,13.978 24.418,13.311 25.203,12.527 25.203,11.485 25.723,10.965 47.72,10.965 48.176,11.422 48.176,12.388 47.211,13.353 47.211,14.42 v1(47.465,14.674) ; v2(47.509,20.677) J2.8
  Bottom Layer w0.152: v1(47.465,14.674) 47.869,15.078 47.869,17.18 48.344,17.655 48.344,20.352 48.019,20.677 v2(47.509,20.677)
PTA2_3: J2.6 U1.24 | length 44.8
  Top Layer w0.152: U1.24 24.918,13.978 24.918,13.345 25.252,13.011 45.548,13.011 v1(46.703,14.166) ; J2.6 48.694,23.252 v2(48.694,25.002) ; v1(49.173,14.753) 49.24,14.753 49.516,14.477 v1(50.538,14.477)
  Bottom Layer w0.152: v1(46.703,14.166) 47.948,14.166 48.557,14.775 49.15,14.775 v1(49.173,14.753) ; v2(48.694,25.002) 48.694,21.877 50.569,20.002 51.719,20.002 52.944,18.777 52.944,15.352 52.069,14.477 v1(50.538,14.477)
PTA3_3: J2.2 R6.1 U1.25 | length 47.1
  Top Layer w0.152: v1(25.24,15.182) 25.369,15.053 U1.25 ; J2.2 v2(50.264,18.832)
  Bottom Layer w0.152: v1(25.24,15.182) 25.24,13.912 24.339,13.011 21.215,13.011 20.668,12.464 20.668,11.575 21.608,10.635 47.871,10.635 48.176,10.94 48.176,13.073 49.656,14.553 49.656,18.223 v2(50.264,18.832) 50.924,18.832 R6.1
PTA4_3: R8.1 U1.26 | length 3.6
  Top Layer w0.152: v1(25.294,16.753) 25.869,16.178 U1.26
  Bottom Layer w0.152: R8.1 25.196,16.852 v1(25.294,16.753)
PTA5: U1.27
PTA12_1: J1.10 U1.28 | length 15.1
  Top Layer w0.152: v1(25.85,24.199) 25.291,24.199 24.986,23.894 24.986,22.725 25.24,22.471 25.24,17.772 26.869,16.143 U1.28
  Bottom Layer w0.152: v1(25.85,24.199) 25.85,26.358 J1.10
PTA13_1: J1.11 U1.29 | length 14.5
  Top Layer w0.152: v1(25.469,23.659) 25.545,23.583 25.545,17.976 27.369,16.151 U1.29
  Bottom Layer w0.152: J1.11 24.224,24.904 v1(25.469,23.659)
PTA19_2: C17.1 R9.1 U1.33 Y2.1 | length 7.4
  Top Layer w0.152: U1.33 30.768,15.828 31.627,15.828 32.352,16.553 v1(34.359,16.553) 34.587,16.553 34.911,16.229 34.911,16.201 35.435,15.677 Y2.1
  Bottom Layer w0.152: R9.1 v1(34.359,16.553) 34.924,16.553 C17.1
PTB0_1: J1.19 U1.35 | length 17.1
  Top Layer w0.152: v1(29.329,17.036) 29.426,17.036 29.584,16.877 U1.35
  Bottom Layer w0.152: J1.19 22.725,10.991 29.914,10.991 30.676,11.753 30.676,15.764 29.404,17.036 v1(29.329,17.036)
PTB1_1: J1.20 U1.36 | length 13.2
  Top Layer w0.152: v1(28.237,16.147) 28.237,17.087 28.669,17.518 29.914,17.518 30.015,17.417 30.679,17.417 U1.36
  Bottom Layer w0.152: J1.20 25.203,13.011 27.844,13.011 28.313,13.48 29.304,13.48 29.634,13.81 29.634,15.512 29.215,15.931 28.504,15.931 28.288,16.147 v1(28.237,16.147)
PTB2_1: J1.21 U1.37 | length 12.8
  Top Layer w0.152: v1(28.009,18.204) 28.517,18.712 29.326,18.712 30.113,17.926 30.67,17.926 U1.37
  Bottom Layer w0.152: J1.21 27.704,12.032 28.72,13.048 29.355,13.048 29.939,13.632 29.939,15.639 29.583,15.994 29.341,16.236 28.86,16.236 28.1,16.995 28.1,17.605 28.009,17.696 v1(28.009,18.204)
PTB3_1: J1.22 U1.38 | length 11.1
  Top Layer w0.152: v1(28.618,19.246) 28.682,19.246 28.885,19.042 29.427,19.042 30.044,18.426 30.357,18.426 30.406,18.377 U1.38
  Bottom Layer w0.152: v1(28.618,19.246) 28.567,19.195 28.567,16.959 28.986,16.541 29.468,16.541 30.269,15.74 30.269,12.997 J1.22
PTB16_1: J1.5 U1.39 | length 14.7
  Top Layer w0.152: 31.456,18.883 30.725,18.883 U1.39 31.831,18.877 v1(31.946,18.992)
  Bottom Layer w0.152: v1(31.946,18.992) 33.8,20.846 33.8,23.792 35.349,25.342 37.534,25.342 J1.5
PTB17_1: J1.12 U1.40 | length 13.7
  Top Layer w0.152: v1(26.154,23.157) 26.561,23.157 28.047,21.671 28.047,20.732 29.401,19.377 U1.40
  Bottom Layer w0.152: J1.12 21.684,25.824 22.395,25.113 23.335,25.113 24.986,23.462 24.986,23.459 25.288,23.157 v1(26.154,23.157)
PTB18_1: J1.28 U1.41 | length 19.4
  Top Layer w0.152: U1.41 35.023,19.877 v1@35.413,19.487 ; v1(35.425,19.5) v1@35.503,19.422 ; v1(37.076,16.147) 37.661,15.563 v1(40.302,15.563)
  Bottom Layer w0.152: v1(35.425,19.5) 35.425,18.763 37.076,17.112 v1(37.076,16.147) ; v1(40.302,15.563) 40.658,15.207 43.401,15.207 44.544,14.064 J1.28
PTB19_1: J1.3 U1.42 | length 18.2
  Top Layer w0.152: U1.42 31.593,20.377 v1@31.793,20.577 ; v1(36.393,25.824) 43.096,25.824 J1.3
  Bottom Layer w0.152: v1(31.844,20.744) 32.784,20.744 33.47,21.43 33.47,24.224 35.07,25.824 v1(36.393,25.824)
PTC0_1: J1.23 U1.43 | length 12.3
  Top Layer w0.152: v1(29.482,20.922) 29.527,20.877 U1.43
  Bottom Layer w0.152: v1(29.482,20.922) 29.202,20.643 29.202,19.017 28.872,18.687 28.872,17.772 29.126,17.518 30.269,17.518 31.336,16.452 31.336,13.581 31.844,13.073 J1.23
PTC1_1: J1.26 U1.44 | length 16.5
  Top Layer w0.152: U1.44 36.367,21.377 v1(36.416,21.328)
  Bottom Layer w0.152: v1(36.416,21.328) 36.162,21.074 36.162,18.611 39.464,15.309 J1.26
PTC2_1: J1.25 U1.45 | length 14.6
  Top Layer w0.152: U1.45 v1@34.384,21.877
  Bottom Layer w0.152: v1(34.384,21.887) 34.384,19.347 36.162,17.569 ; 36.187,17.544 36.162,17.569 ; J1.25 36.924,13.175 36.568,13.531 36.568,17.137 36.162,17.544 36.162,17.569
PTC3_1: J1.6 U1.46 | length 9.1
  Top Layer w0.152: U1.46 31.975,22.377 32.276,22.678 32.276,24.224 33.012,24.961 34.613,24.961 J1.6
PTC4_1: J1.9 U1.49 | length 2.2
  Top Layer w0.152: U1.49 28.869,26.202 29.082,26.415 29.082,27.05 J1.9
PTC5: U1.50
PTC6_2: R15.1 R16.2 U1.51 | length 6.1
  Top Layer w0.152: U1.51 27.869,23.271 28.574,22.567 v1(28.574,21.081)
  Bottom Layer w0.152: R16.2 R15.1 v1(28.574,21.081)
PTC7: U1.52
PTC8: U1.53
PTC9: U1.54
PTC10: U1.55
PTC11: U1.56
PTD0: U1.57
PTD1_1: J1.24 U1.58 | length 21
  Top Layer w0.152: U1.58 24.369,20.32 24.732,19.957 v1(24.732,18.915) ; v1(26.027,18.941) 27.247,17.722 28.208,17.722 28.488,18.001 v1(29.355,18.001)
  Bottom Layer w0.152: v1(24.732,18.915) 25.977,18.915 26.002,18.941 v1(26.027,18.941) ; v1(29.355,18.001) 30.447,18.001 31.641,16.807 31.641,13.785 32.174,13.251 33.165,13.251 J1.24
PTD2_1: J1.8 U1.59 | length 10.9
  Top Layer w0.152: U1.59 23.869,26.079 24.084,26.293 24.629,26.293 25.203,26.867 25.203,28.073 25.494,28.364 30.752,28.364 J1.8
PTD3_1: J1.7 U1.60 | length 14.8
  Top Layer w0.152: U1.60 23.369,26.273 23.174,26.468 23.174,27.797 24.046,28.669 32.987,28.669 J1.7
PTD4_1: J1.13 U1.61 | length 6.9
  Top Layer w0.152: J1.13 20.211,28.339 22.141,28.339 22.663,27.817 22.663,26.344 22.869,26.138 U1.61
PTD5_1: J1.16 U1.62 | length 19.1
  Top Layer w0.152: v1(21.684,23.31) 21.836,23.31 22.369,23.843 U1.62
  Bottom Layer w0.152: J1.16 14.191,12.159 14.191,12.921 14.801,13.531 16.756,13.531 18.509,15.283 18.509,20.16 19.119,20.77 19.119,22.878 19.55,23.31 v1(21.684,23.31)
PTD6_1: J1.14 U1.63 | length 6.4
  Top Layer w0.152: J1.14 17.82,26.056 21.605,26.056 21.82,25.84 21.82,25.276 U1.63
PTD7_1: J1.15 U1.64 | length 8.5
  Top Layer w0.152: J1.15 15.69,25.646 21.328,25.646 21.379,25.697 21.379,25.237 U1.64
PTE0_1: J1.1 U1.1 | length 38.6
  Top Layer w0.152: U1.1 19.527,23.377 19.601,23.451 v1(19.601,25.037) ; v1(31.006,25.977) 34.511,25.977 35.476,26.942 35.476,27.907 36.162,28.593 48.303,28.593 J1.1
  Bottom Layer w0.152: v1(19.601,25.037) 19.601,26.002 19.576,26.027 20.123,26.574 20.123,27.539 21.252,28.669 29.812,28.669 30.865,27.616 30.865,26.213 31.006,26.073 v1(31.006,25.977)
PTE1_1: J1.2 U1.2 | length 37.2
  Top Layer w0.152: U1.2 20.363,22.878 20.541,23.056 20.541,25.062 v1(20.516,25.088) ; v1(30.371,25.342) 34.46,25.342 35.857,26.739 35.857,27.678 36.467,28.288 46.068,28.288 J1.2
  Bottom Layer w0.152: v1@20.541,25.088 20.541,27.527 21.302,28.288 29.761,28.288 30.371,27.678 v1(30.371,25.342)
PW-Lin1_4: C18.2 C19.1 J4.1 U2.1 U2.2 U2.19 U2.20 | length 1.1
  Bottom Layer w0.152: v1(37.394,22.077) 37.394,21.981 37.544,21.831 C19.1
  other v1: 37.394,22.802 38.044,22.802
  other v2: 38.044,22.077
USB-D_2_N: J3.2 U1.6 | length 3.8
  Top Layer w0.152: J3.2 15.808,21.049 17.798,21.049 17.97,20.877 U1.6
USB-D_2_P: J3.3 U1.5 | length 3.5
  Top Layer w0.152: J3.3 J3.3@16.995,20.358 ; v1(18.537,21.377) U1.5
  Bottom Layer w0.152: J3.3 17.04,20.281 17.04,20.876 17.214,21.049 17.798,21.049 18.126,21.377 v1(18.537,21.377)
V-USB_1: D1.1 J3.1 J5.2 R15.2 | length 19.7
  Bottom Layer w0.254: R15.2@27.723,21.881 R15.2
  Bottom Layer w0.508: J3.1 16.995,23.295 17.899,24.199 23.31,24.199 25.634,21.875 D1.1 27.717,21.875 27.723,21.881 R15.2@27.729,21.887 ; R15.2 32.269,21.881 v2(32.86,22.471) v1(32.86,23.259)
  other v1: 32.86,23.945
VBAT_M_3: R4.1 U1.21 | length 6.1
  Top Layer w0.254: U1.21 23.369,15.368 24.326,16.325 v1(24.326,16.35)
  Bottom Layer w0.254: v1(24.326,16.35) 24.373,16.35 24.601,16.121 26.408,16.121 26.815,16.528 ; 26.821,16.534 R4.1
VDDA_3: C1.1 C2.1 C14.2 L1.2 U1.13 U1.14 | length 2.8
  Top Layer w0.254: U1.14 19.525,16.883 v1(20.897,16.883) ; U1.13 20.552,17.377 v1(20.668,17.493)
  Bottom Layer w0.254: C2.1 C2.1@19.482,16.91 ; C1.1 C1.1@20.287,16.877
VREF_1: C12.1 J1.18 U1.17 | length 4.7
  Top Layer w0.254: J1.18 19.144,13.556 19.615,14.027 v1(20.047,14.027) U1.17
  Bottom Layer w0.254: C12.1 20.035,14.039 v1(20.047,14.027)
Vregin_3: C5.1 R1.2 R10.2 U1.8 | length 4.7
  Top Layer w0.254: U1.8 v1(21.198,19.877)
  Bottom Layer w0.254: R10.2 21.149,20.126 21.149,19.926 v1(21.198,19.877) 21.267,19.877 21.321,19.822 21.825,19.822 C5.1 R1.2 R1.2@21.834,20.481
pads on no net: J1.M1 J1.M2 J1.M3 J1.M4 J2.M1 J2.M2 J2.M3 J2.M4 J2.P1 J2.P2 J2.P3 Y2.2 Y2.4

## Polygon pours and split planes (outlines as drawn)
GND on Bottom Layer "C_P3V3_L03_P-001" (solid, remove dead copper, pour order 2): 40.119,21.852 39.744,21.477 38.619,21.477 38.394,21.252 38.394,17.877 39.394,16.877 40.694,16.877 40.794,16.977 40.794,18.177 41.419,18.802 42.869,18.802 42.969,18.902 42.969,19.752 42.819,19.902 41.694,19.902 41.319,20.277 41.319,22.927 41.169,23.077 40.244,23.077 40.119,22.952
V-USB_1 on Bottom Layer "C_P3V3_L03_P-001" (solid, remove dead copper, pour order 14): 32.479,23.208 32.708,22.979 33.012,22.979 33.216,23.183 33.216,24.122 33.038,24.3 32.733,24.3 32.479,24.046
GND on Bottom Layer "C_P3V3_L03_P-001" (solid, remove dead copper, pour order 9): 26.231,23.716 26.713,23.233 27.501,23.233 27.907,23.64 27.907,25.113 27.678,25.342 26.586,25.342 26.231,24.986
3V3 on Bottom Layer "C_P3V3_L03_P-001" (solid, remove dead copper, pour order 8): 28.085,23.36 28.364,23.081 29.355,23.081 29.558,23.284 29.558,25.088 29.406,25.24 28.313,25.24 28.085,25.011
GND on Bottom Layer "C_P3V3_L03_P-001" (solid, remove dead copper, pour order 7): 18.915,19.347 19.169,19.093 20.414,19.093 20.871,18.636 22.014,18.636 22.167,18.788 22.167,19.093 21.963,19.296 21.481,19.296 21.354,19.423 21.074,19.423 20.566,19.931 20.566,20.16 20.338,20.389 19.119,20.389 18.915,20.185
VDDA_3 on Bottom Layer "C_P3V3_L03_P-001" (solid, remove dead copper, pour order 6): 18.89,18.712 18.89,16.629 19.068,16.452 20.592,16.452 20.719,16.579 22.116,16.579 22.37,16.833 22.37,18.179 22.192,18.357 20.77,18.357 20.287,18.839 19.017,18.839
5V on Bottom Layer "C_P3V3_L03_P-001" (solid, remove dead copper, pour order 3): 41.694,21.777 41.469,21.552 41.469,20.427 41.569,20.327 42.769,20.327 42.969,20.527 42.969,22.977 42.794,23.152 41.844,23.152 41.694,23.002
PW-Lin1_4 on Bottom Layer "C_P3V3_L03_P-001" (solid, remove dead copper, pour order 1): 37.044,21.777 37.194,21.627 39.544,21.627 39.619,21.702 39.619,23.027 39.519,23.127 37.269,23.127 37.044,22.902
5V on Bottom Layer "C_P3V3_L03_P-001" (solid, remove dead copper, pour order 0): 41.119,16.927 41.269,16.777 42.819,16.777 42.994,16.952 42.994,18.102 42.769,18.327 41.219,18.327 41.119,18.227
5V on Top Layer "C_P3V3_L03_P-001" (solid, remove dead copper, pour order 15): 34.638,23.081 34.765,22.954 35.908,22.954 36.137,23.183 36.137,24.63 35.933,24.834 35.019,24.834 34.638,24.453
V-USB_1 on Top Layer "C_P3V3_L03_P-001" (solid, remove dead copper, pour order 13): 32.555,23.081 32.682,22.954 34.359,22.954 34.46,23.056 34.46,24.122 34.206,24.376 32.835,24.376 32.555,24.097
GND on Top Layer "C_P3V3_L03_P-001" (solid, remove dead copper, pour order 12): 13.937,13.378 14.191,13.124 15.232,13.124 15.461,13.353 15.461,15.004 15.258,15.207 14.14,15.207 13.937,15.004
3V3 on Top Layer "C_P3V3_L03_P-001" (solid, remove dead copper, pour order 11): 15.69,13.099 15.791,12.997 16.833,12.997 17.29,13.454 17.29,14.902 16.909,15.283 15.994,15.283 15.69,14.978
3V3 on Top Layer "C_P3V3_L03_P-001" (solid, remove dead copper, pour order 10): 36.365,23.335 36.568,23.132 36.924,23.132 37.026,23.233 38.499,23.233 38.6,23.335 38.6,24.732 38.169,25.164 37.153,25.164 36.365,24.376
5V on Top Layer "C_P3V3_L03_P-001" (solid, remove dead copper, pour order 5): 40.469,21.927 41.544,21.927 41.894,21.577 41.894,20.502 42.944,20.502 42.994,20.552 42.994,22.977 42.819,23.152 40.669,23.152 40.469,22.952
PW-Lin1_4 on Top Layer "C_P3V3_L03_P-001" (solid, remove dead copper, pour order 4): 36.944,20.627 37.094,20.477 38.119,20.477 38.119,21.627 38.419,21.927 39.519,21.927 39.519,22.977 39.769,23.227 39.969,23.227 40.094,23.352 40.094,24.302 39.969,24.427 38.769,24.427 38.719,24.377 38.719,23.177 38.644,23.102 37.294,23.102 36.944,22.752
GND on InternalPlane1 (split plane): 53.178,10.51 10.51,10.51 10.51,28.794 53.178,28.794
3V3 on InternalPlane2 (split plane): 53.178,13.787 45.258,13.787 44.419,14.626 44.419,19.398 44.41,19.448 44.382,19.49 43.454,20.417 43.454,23.03 43.444,23.08 43.416,23.122 42.959,23.579 42.917,23.607 42.868,23.617 40.886,23.617 40.837,23.607 40.795,23.579 40.147,22.931 36.851,22.931 36.469,23.312 36.469,24.91 36.459,24.959 36.431,25.001 36.101,25.332 36.059,25.36 36.01,25.369 34.994,25.369 34.944,25.36 34.902,25.332 34.242,24.671 34.214,24.629 34.204,24.58 34.204,22.37 34.214,22.32 34.242,22.278 38.484,18.035 38.526,18.007 38.576,17.998 41.165,17.998 41.94,17.223 41.94,14.731 40.795,13.586 40.767,13.544 40.757,13.494 40.757,10.51 10.51,10.51 10.51,28.794 53.178,28.794
5V on InternalPlane2 (split plane): 36.21,24.856 36.21,23.259 36.22,23.209 36.248,23.167 36.705,22.71 36.747,22.682 36.797,22.672 40.201,22.672 40.25,22.682 40.292,22.71 40.94,23.358 42.814,23.358 43.195,22.977 43.195,20.363 43.205,20.314 43.233,20.272 44.161,19.344 44.161,14.572 44.17,14.522 44.198,14.48 45.113,13.566 45.155,13.538 45.204,13.528 53.178,13.528 53.178,10.51 41.016,10.51 41.016,13.441 42.161,14.585 42.189,14.627 42.198,14.677 42.198,17.277 42.189,17.327 42.161,17.369 41.311,18.219 41.269,18.247 41.219,18.256 38.63,18.256 34.463,22.423 34.463,24.526 35.047,25.111 35.956,25.111

## Other copper
Top Layer:
  text "1" at 44.163,24.859 h0.76
Bottom Layer:
  text "4" at 46.601,24.859 h0.76
InternalPlane1 (plane layer: these items are gaps in the copper):
  text "2" at 44.9,24.859 h0.76
InternalPlane2 (plane layer: these items are gaps in the copper):
  lines w0.254: 40.886,10 40.886,13.494 42.069,14.677 42.069,17.277 41.219,18.127 38.576,18.127 34.333,22.37 34.333,24.58 34.994,25.24 36.01,25.24 36.34,24.91 36.34,23.259 36.797,22.802 40.201,22.802 40.886,23.487 41.674,23.487 42.868,23.487 43.325,23.03 43.325,20.363 44.29,19.398 44.29,14.572 45.204,13.658 53.764,13.658
  text "3" at 45.789,24.859 h0.76

## Silkscreen, mask and mechanical layers (free items; w line width, h text height)
Top Overlay:
  text ".Project_Name" at 37.194,14.039 h0.76
  text ".Project_Revision" at 40.306,12.997 h0.76
Bottom Overlay:
  rectangle: 29.583,23.462 43.119,25.824
  text "SN:" at 46.83,23.843 h1.5
Mechanical 1:
  the board outline again, w0.1